# EAGLE board stereomvs_fixed (EAGLE 8.0.1)
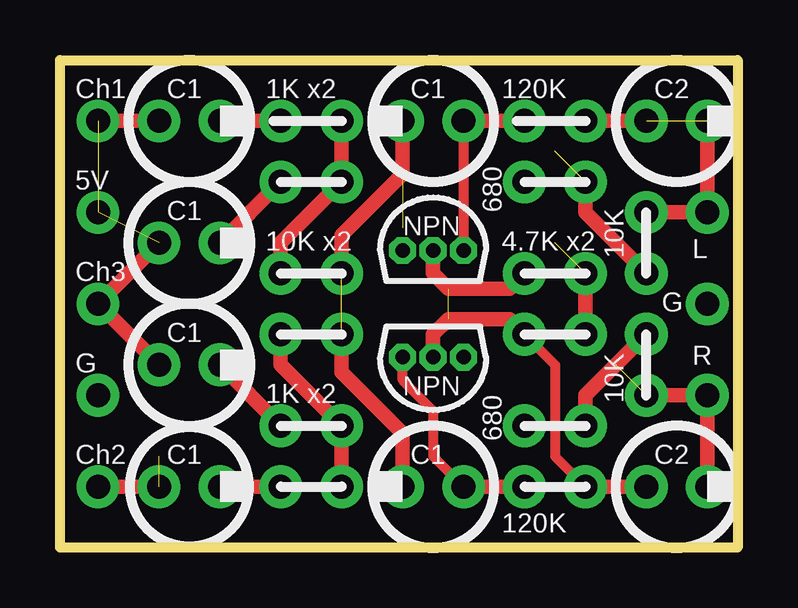
[diagram p0: board, top side]
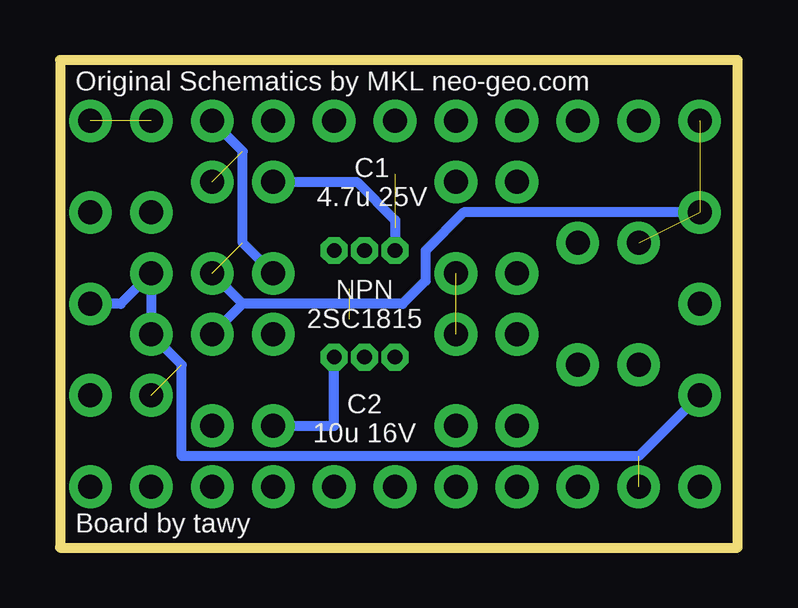
[diagram p1: board, bottom side, seen from below]

Size 28.26 x 20.32 mm. Coordinates in mm from the lower left corner, seen from the top.
Outline: 0,20.32 28.26,20.32 28.26,0 0,0 0,20.32
Copper layers (1*16): Top 0.035mm / dielectric 1.5mm / Bottom 0.035mm
Design rules "default": minimum track width 10mil, minimum drill 24mil, track to track 8mil, track to pad 8mil, pad to pad 8mil, via to via 8mil, smd to smd 8mil, copper to edge 40mil, drill to drill 8mil, minimum pad ring 10mil, minimum via ring 8mil, stop-mask expansion 4mil, vias tented up to drill 0mil, thermal gap 10mil

## Footprints (pad centres in the part's own frame; a part is rotated, then mirrored left to right if it is on the bottom)
Z03A = drill 0.61 octagon: 1 -1.27,0; 2 0,0; 3 1.27,0

## Placement (x,y rotation side)
E$3  [Z03A]  15.56,12.38 0 top
E$4  [Z03A]  15.56,7.94 180 top

## Library data of the parts
E$3 E$4 = linear

## Nets
S$3: E$3.3
S$5: E$3.2 E$4.2
S$6: E$4.1
S$8: E$4.3
S$26: E$3.1

## Tracks (layer width: path | path; a pad name or v marks a point on that pad's centre or on a via)
S$1  (via drill 1 pad 1.78)
  Top 0.61: v11.75,17.78 v11.75,15.24 9.21,12.7 v9.21,11.43
S$2  (via drill 1 pad 1.78)
  Top 0.61: v6.67,2.54 v9.21,2.54
S$3  (via drill 1 pad 1.78)
  Top 0.406: v16.83,17.78 E$3.3
  Top 0.61: v16.83,17.78 v19.37,17.78
S$4  (via drill 1 pad 1.78)
  Top 0.61: v6.67,7.62 v9.21,5.08
S$5  (via drill 1 pad 1.78)  (8 unrouted)
  Top 0.406: v19.37,8.89 20.64,7.62 20.64,3.81 v21.91,2.54
  Top 0.61: E$4.2 15.56,8.89 16.19,9.53 18.73,9.53 v19.37,8.89 | v21.91,15.24 21.91,13.97 v24.45,11.43 | v26.99,17.78 v26.99,13.97 v24.45,13.97 | v26.99,2.54 v26.99,6.35 v24.45,6.35 | E$3.2 15.56,11.43 16.19,10.8 18.73,10.8 v19.37,11.43 | v21.91,11.43 v21.91,8.89 | v1.59,17.78 v4.13,17.78 | v1.59,2.54 v4.13,2.54 | v4.13,12.7 v1.59,10.16 v4.13,7.62 | v21.91,17.78 v24.45,17.78 | v21.91,2.54 v24.45,2.54 | v24.45,8.89 21.91,6.35 v21.91,5.08
  Bottom 0.406: v26.99,10.16 25.72,10.16 v24.45,11.43 v24.45,8.89 23.18,7.62 23.18,3.81 4.13,3.81 v1.59,6.35 | v1.59,13.97 11.43,13.97 13.02,12.38 13.02,11.11 13.97,10.16 20.64,10.16 | v21.91,11.43 20.64,10.16 | 20.64,10.16 v21.91,8.89 | v19.37,11.43 20.64,12.7 20.64,16.51 v21.91,17.78
S$6  (via drill 1 pad 1.78)
  Bottom 0.406: v19.37,5.08 16.83,5.08 E$4.1
S$7  (via drill 1 pad 1.78)
  Top 0.61: v6.67,12.7 v9.21,15.24
S$8  (via drill 1 pad 1.78)
  Top 0.406: E$4.3 14.29,6.99 15.56,5.71 15.56,3.81 v16.83,2.54
  Top 0.61: v16.83,2.54 v19.37,2.54
S$9  (via drill 1 pad 1.78)
  Top 0.61: v6.67,17.78 v9.21,17.78
S$18  (via drill 1 pad 1.78)
  Top 0.61: v11.75,2.54 v11.75,5.08 9.21,7.62 v9.21,8.89
S$20  (via drill 1 pad 1.78)  (2 unrouted)
  Top 0.61: v11.75,8.89 11.75,7.3 14.29,4.76 v14.29,2.54 | v14.29,17.78 14.29,15.56 11.75,13.02 v11.75,11.43
S$26  (via drill 1 pad 1.78)
  Bottom 0.406: v19.37,15.24 15.87,15.24 14.29,13.65 E$3.1

## Text on the board
tPlace: Ch1 | C1 | 1K x2 | C1 | 120K | C2 | 5V | C1 | 680 | 10K x2 | NPN | 4.7K x2 | 10K | L | Ch3 | G | C1 | G | R | NPN | 1K x2 | 10K | 680 | Ch2 | C1 | C1 | C2 | 120K
bPlace: Original Schematics by MKL neo-geo.com | C1 / 4.7u 25V | NPN / 2SC1815 | C2 / 10u 16V | Board by tawy